# Altium PCB PCB2.PcbDoc
Units mm, origin at the board's own origin, x right, y up, seen from the top; angles counter-clockwise.
Board outline 55.12 x 52.96 mm, 2 copper layers (Top Layer, Bottom Layer); 29 components, 29 nets, 202 pads, 25 vias.
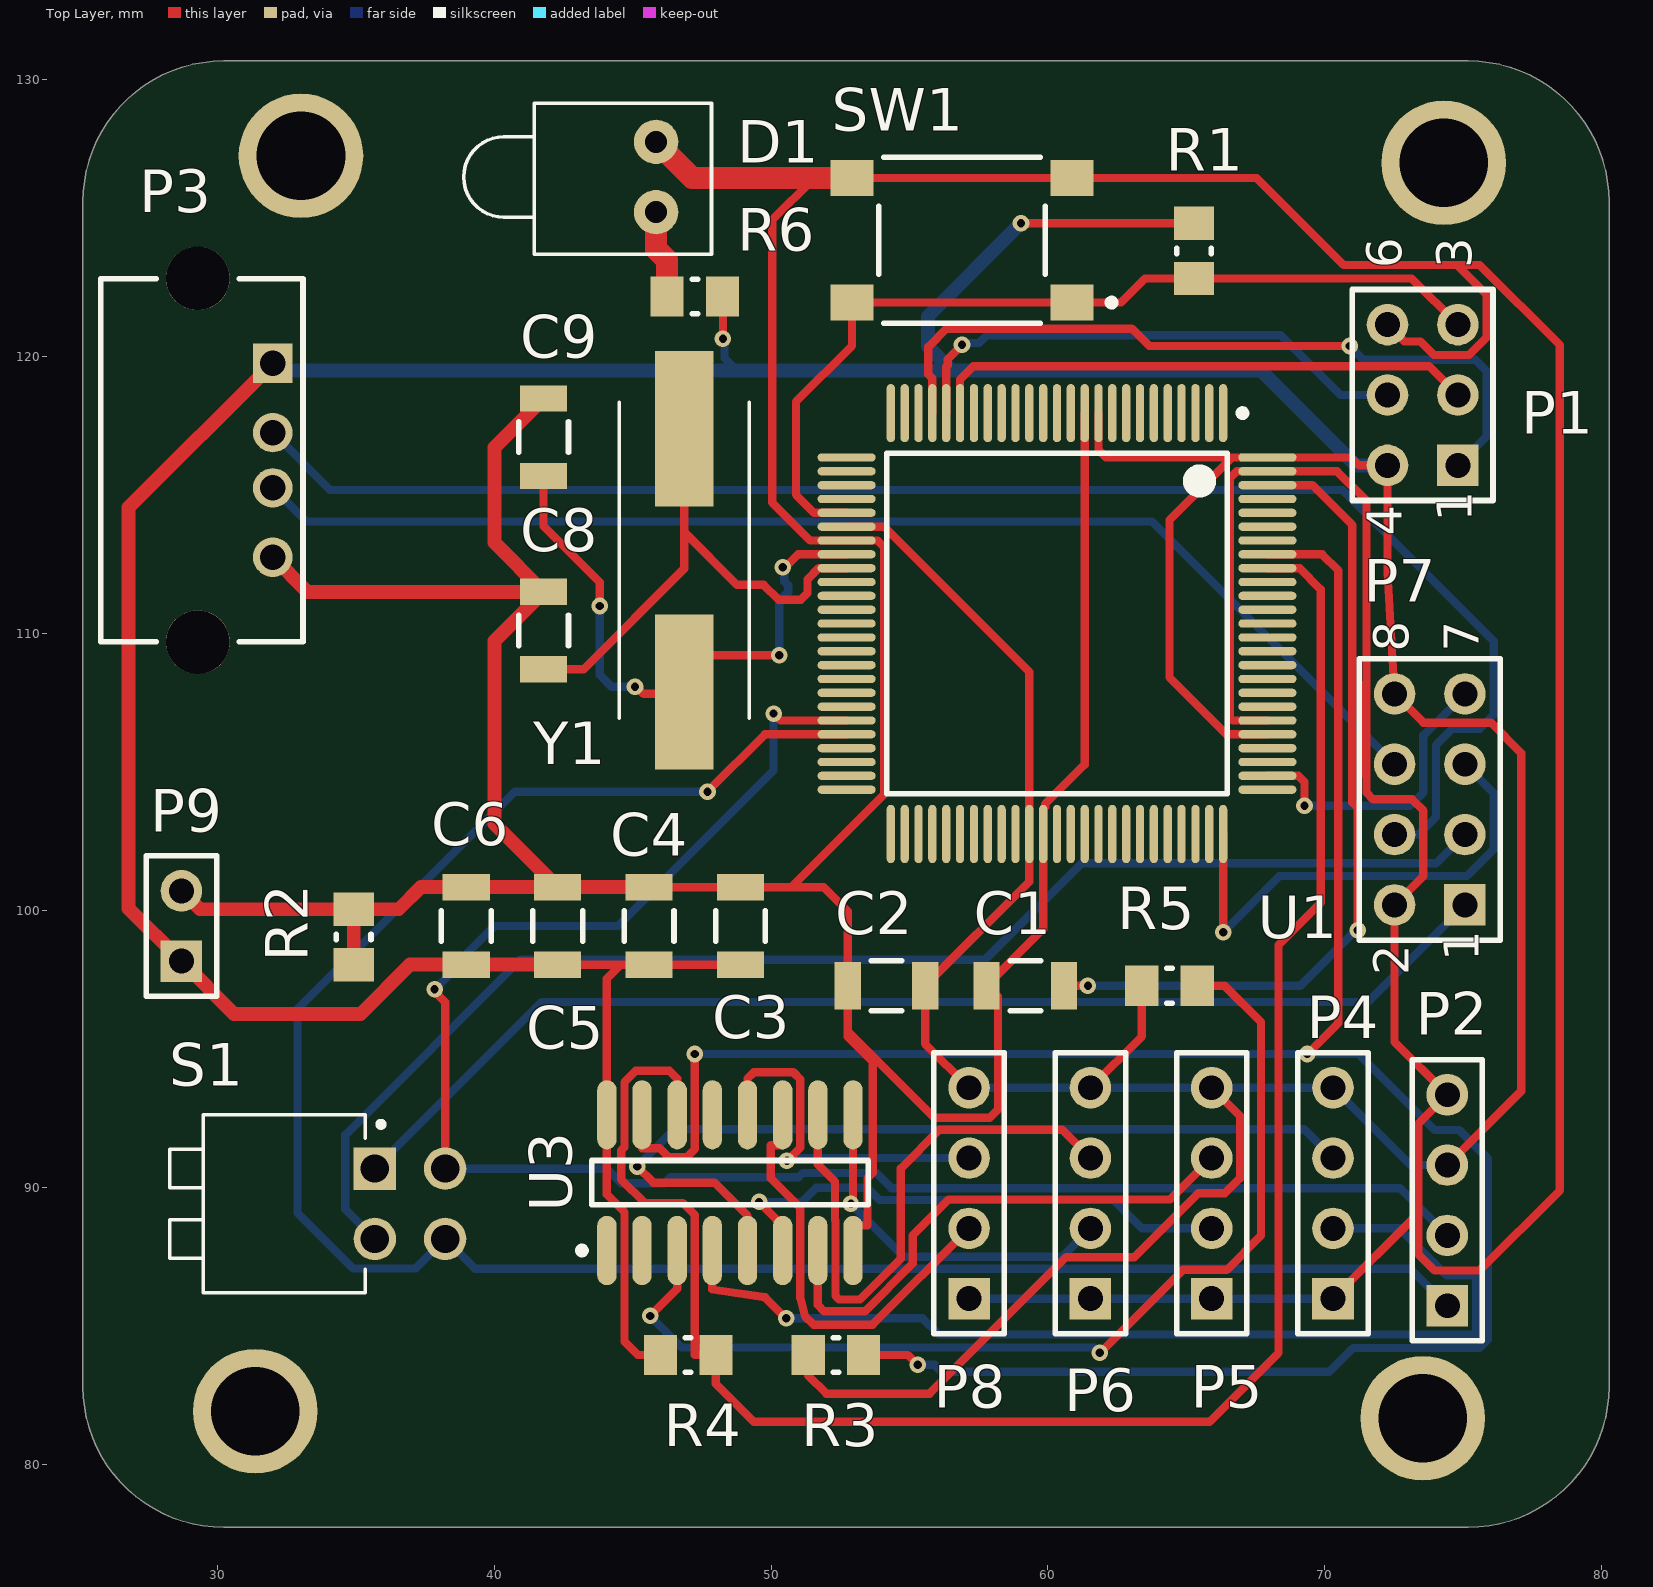
[diagram p0: Top Layer view]
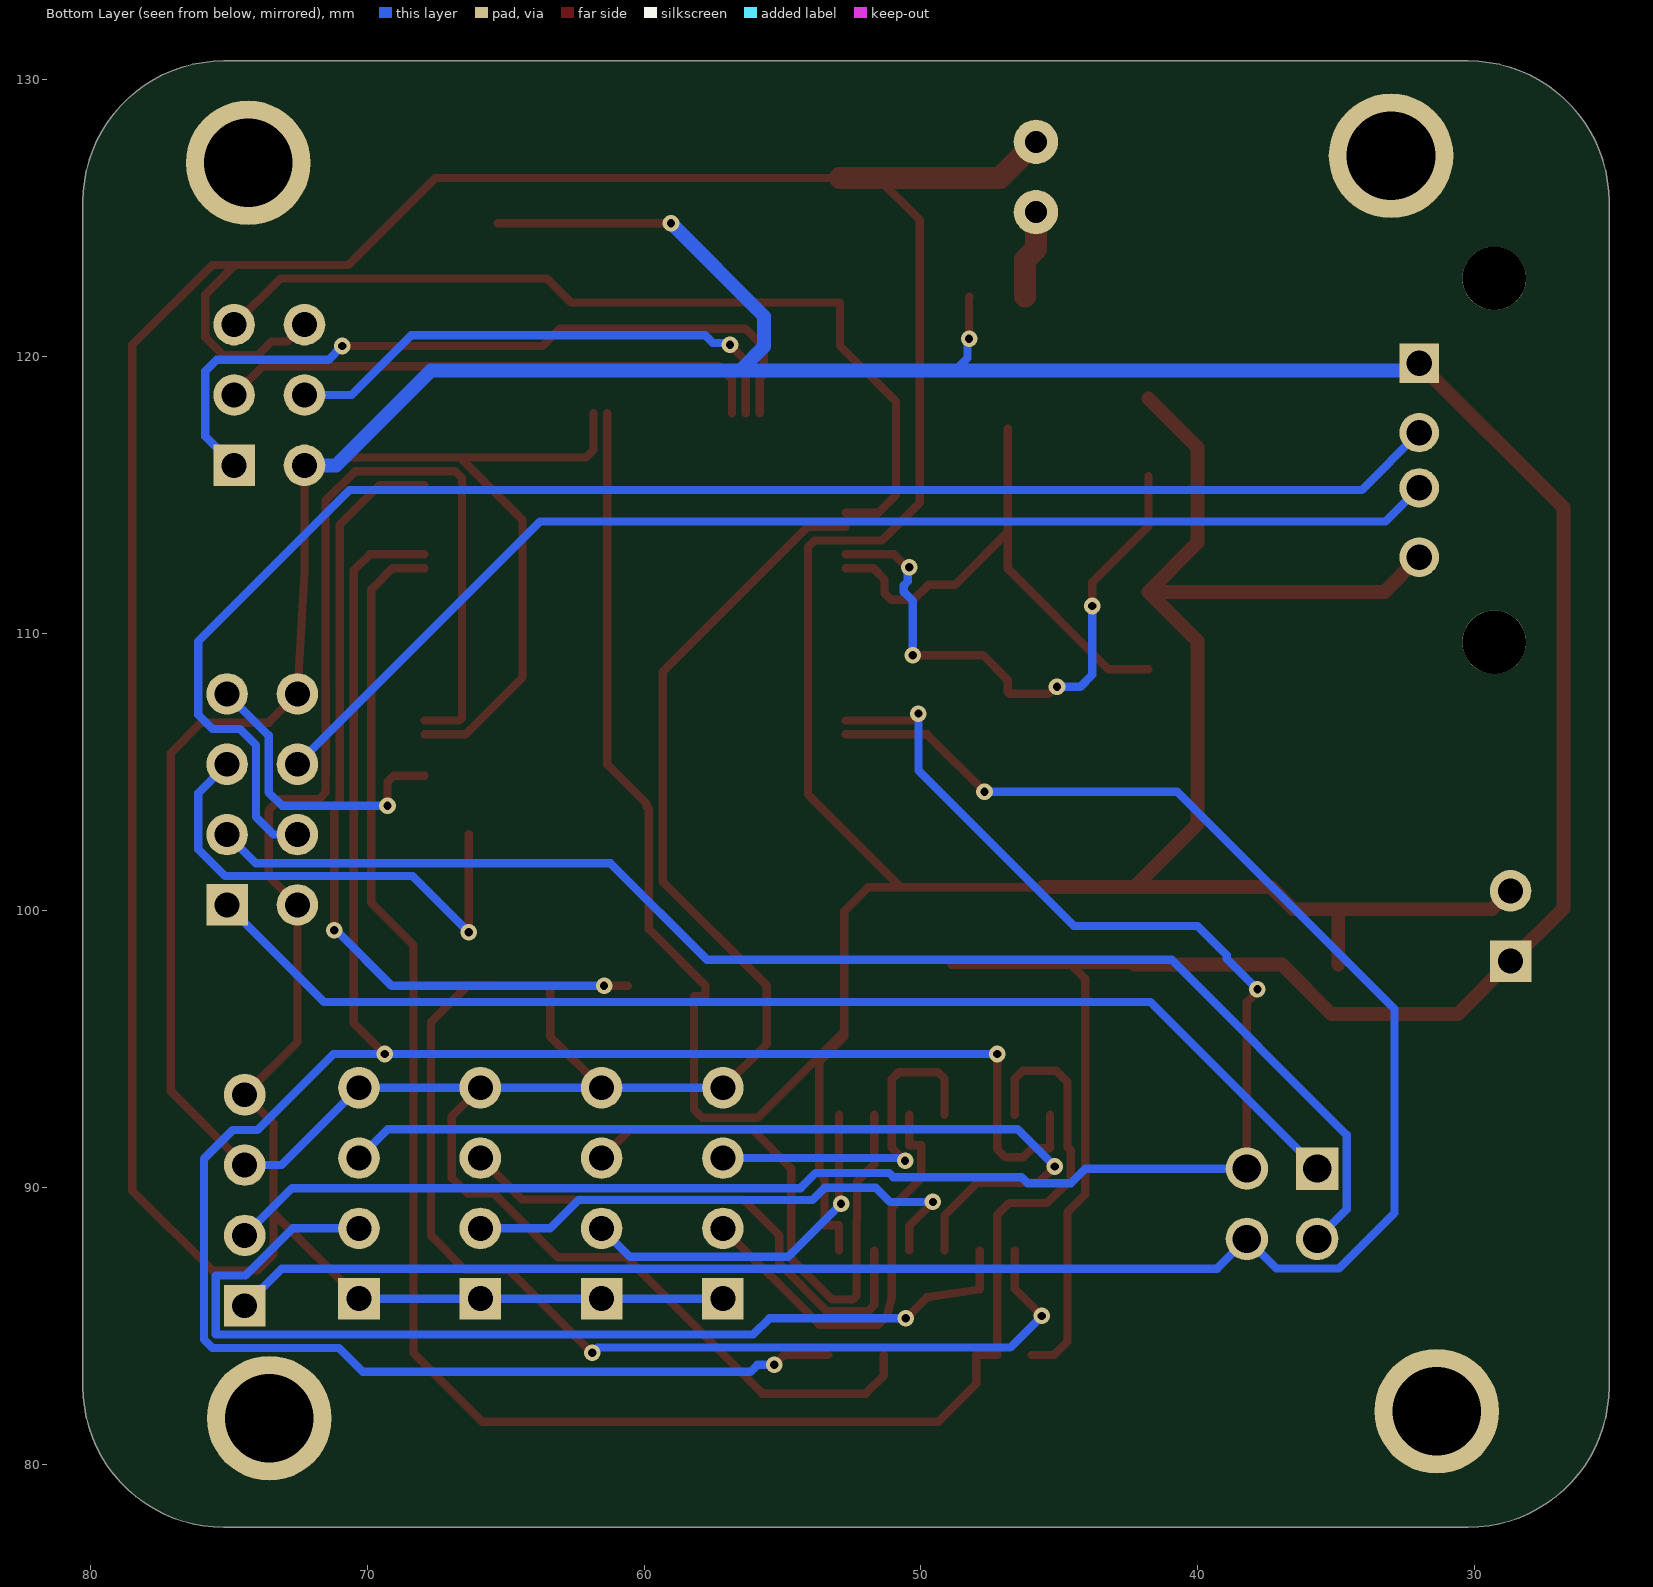
[diagram p1: Bottom Layer view, seen from below]
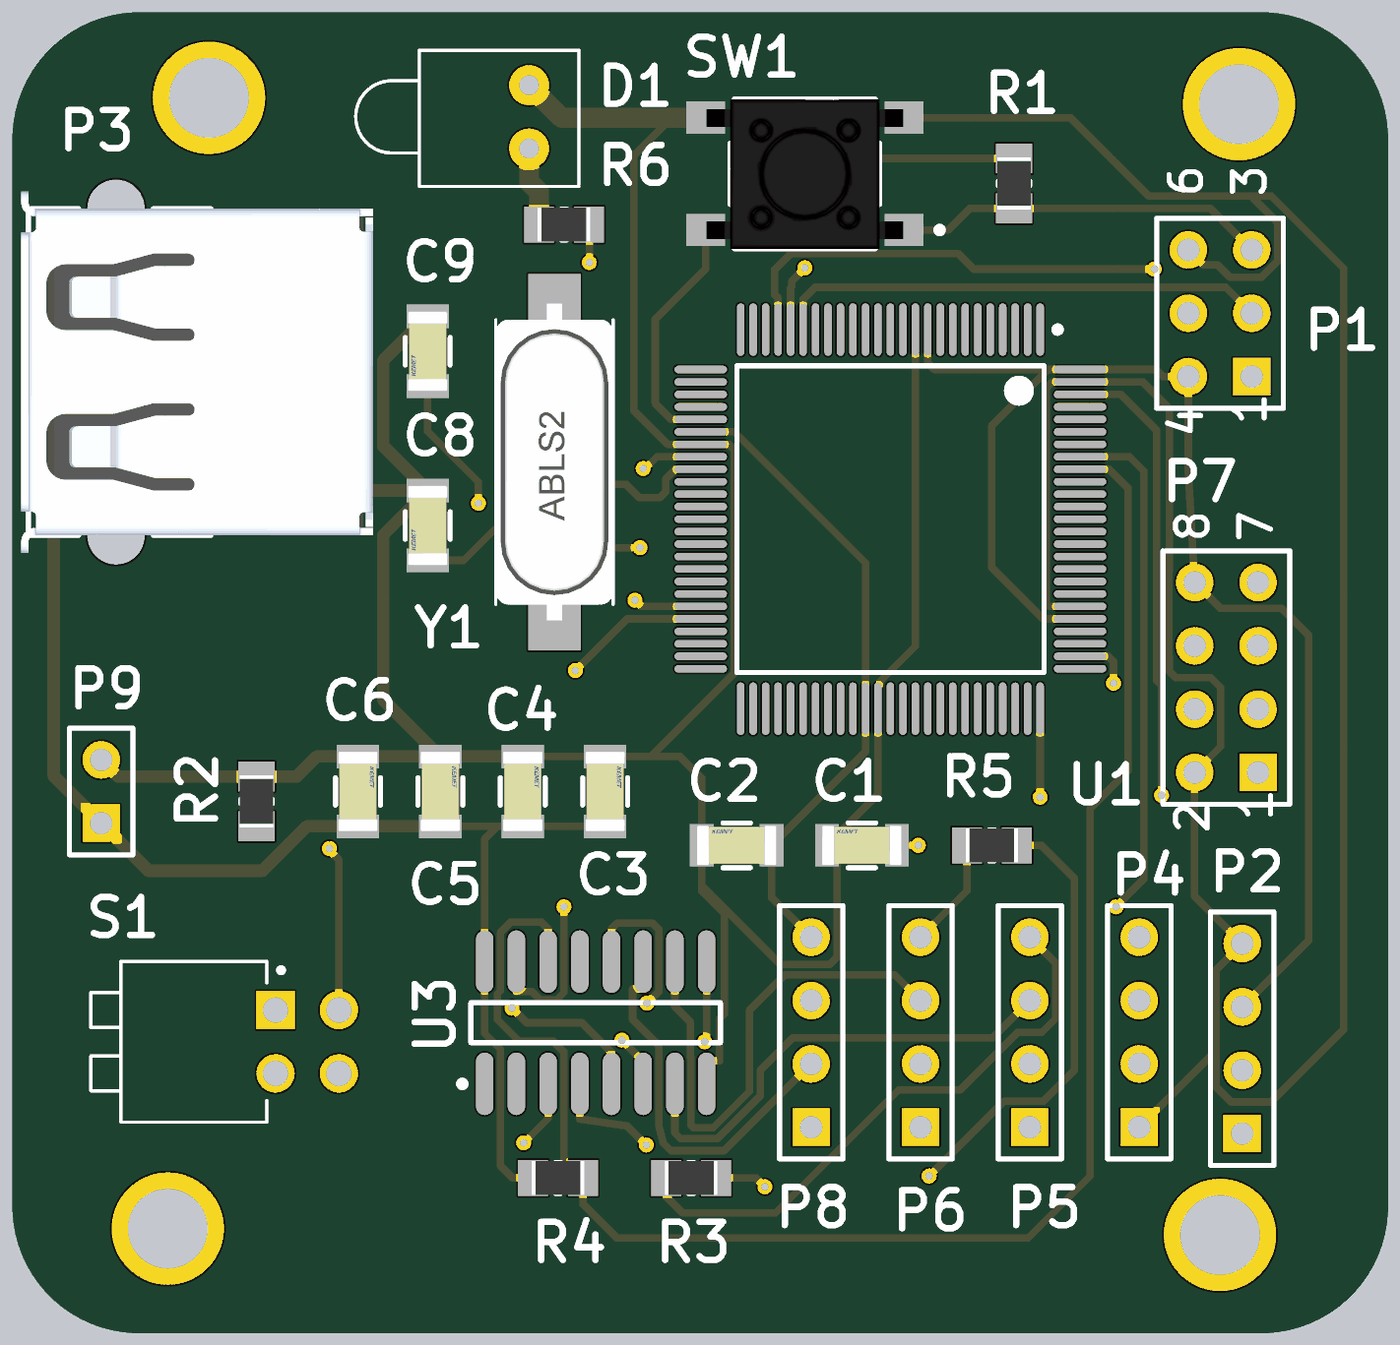
[diagram p2: 3D render of the assembled board from above, using the file's embedded part models]

## Layer stack, top to bottom
Top Solder: solder mask 0.0102, Solder Resist, Dk 3.5
Top Layer: signal copper 0.0356
Dielectric 1: dielectric 0.32, FR-4, Dk 4.8
Bottom Layer: signal copper 0.0356
Bottom Solder: solder mask 0.0102, Solder Resist, Dk 3.5

## Board outline
25.146,82.804 25.146,125.603 cw(c30.226,125.603) 30.226,130.683 75.184,130.683 cw(c75.184,125.603) 80.264,125.603 80.264,82.804 cw(c75.184,82.804) 75.184,77.724 30.226,77.724 cw(c30.226,82.804)

## Design rules (kind name [scope] priority, off if disabled: settings)
BoardOutlineClearance [All] p1: gap=0.2 ignorepadtopadclearanceinfootprint=FALSE
Clearance [All] p1: gap=0.127 ignorepadtopadclearanceinfootprint=FALSE except(0.25: Arc-Hole Track-Hole SMDPad-Hole THPad-Hole Via-Hole Fill-Hole Poly-Hole Region-Hole Text-Hole)
ComponentClearance [All] p1: gap=0.127 collisioncheckmode=3 verticalgap=0.127 showdistances=TRUE
DiffPairsRouting [All] p1: maxlimit=0.254 minlimit=0.127 mostfreqgap=0.127 toplayer_minwidth=0.127 toplayer_maxwidth=25.4 toplayer_prefwidth=0.127 bottomlayer_minwidth=0.127 bottomlayer_maxwidth=25.4 bottomlayer_prefwidth=0.127 maxuncoupledlength=12.7
Height [All] p1: minheight=0 maxheight=1816.048 prefheight=12.7
HoleSize [All] p1: absolutevalues=TRUE maxlimit=6.3 minlimit=0.3 maxpercent=80.000 minpercent=20.000
HoleToHoleClearance [All] p1: gap=0.25 allowstackedmicrovias=FALSE
MinimumAnnularRing [All] p1: minimumring=0.076
MinimumSolderMaskSliver [All] p1: minsoldermaskwidth=0
PlaneClearance [All] p1: clearance=0.127
PlaneConnect PlaneConnectPowerPads [InPadClass('PowerPads')] p1: planeconnectstyle=Direct reliefexpansion=0.508 reliefentries=4 reliefconductorwidth=0.254 reliefairgap=0.254
PlaneConnect [All] p2: pad.planeconnectstyle=Relief pad.reliefexpansion=0.3 pad.reliefentries=4 pad.reliefconductorwidth=0.127 pad.reliefairgap=0.127 via.planeconnectstyle=Direct via.reliefexpansion=0.3 via.reliefentries=4 via.reliefconductorwidth=0.127 via.reliefairgap=0.127
PolygonConnect PolygonConnectPowerPads [All vs (InPadClass('PowerPads'))] p1: connectstyle=Direct reliefconductorwidth=0.254 reliefentries=4 polygonreliefangle="90 Angle" airgapwidth=0.254
PolygonConnect [All] p2: thpad.connectstyle=Relief thpad.reliefconductorwidth=0.127 thpad.reliefentries=4 thpad.polygonreliefangle="90 Angle" thpad.airgapwidth=0.127 smdpad.connectstyle=Relief smdpad.reliefconductorwidth=0.127 smdpad.reliefentries=4 smdpad.polygonreliefangle="90 Angle" smdpad.airgapwidth=0.127 via.connectstyle=Direct via.reliefconductorwidth=0.127 via.reliefentries=4 via.polygonreliefangle="90 Angle" via.airgapwidth=0.127
RoutingVias [All] p1: holewidth=0.3 width=0.6 viastyle="Through Hole" minholewidth=0.3 minwidth=0.6 maxholewidth=0.6 maxwidth=6.6
SilkToSilkClearance [All] p1: silktosilkclearance=0
SilkToSolderMaskClearance [IsPad] p1: minsilkscreentomaskgap=0.127 clearancetoexposedcopper=TRUE
SolderMaskExpansion [All] p1: expansion=0.075 istentingtop=FALSE
Width [All] p1: maxlimit=25.4 minlimit=0.127 preferedwidth=0.3 toplayer_minwidth=0.2 minimp=50.000000 maximp=50.000000 favimp=50.000000
20 further rules are at their usual default settings.

## Classes and differential pairs
component class Main: D1 P3 P4 P5 P6 P7 P8 P9 R6
component class Designator: C1 C2 C3 C4 C6 C8 C9 P1 P2 R1 R2 S1 SW1 U1 Y1

## Components (designator, comment, footprint, x,y, rotation, side; value= is the part's Value field where it differs from the comment)
C1 "100nF" FP-C1206C-EB-MFG 59.182,97.282 r0 top value="0.10 μF"
C2 "100nF" FP-C1206C-EB-MFG 54.165,97.282 r0 top value="0.10 μF"
C3 "100nF" FP-C1206C-EB-MFG 48.895,99.444 r270 top value="0.10 μF"
C4 "100nF" FP-C1206C-EB-MFG 45.593,99.444 r270 top value="0.10 μF"
C5 "100nF" FP-C1206C-EB-MFG 42.291,99.444 r270 top value="0.10 μF"
C6 "0.3uF" FP-C1206C-EB-MFG 38.989,99.444 r270 top value="0.10 μF"
C8 "22pF" FP-C1206C-EB-MFG 41.783,110.109 r90 top value="0.10 μF"
C9 "22pF" FP-C1206C-EB-MFG 41.783,117.094 r90 top value="0.10 μF"
D1 "LED1" LED-1 45.847,126.492 r180 top (schematic designator D?)
P1 "Header 3X2A" HDR2X3_CEN 74.803,116.078 r90 top
P2 "Header 4" HDR1X4 74.422,85.725 r90 top
P3 "USB-A1HSW6" OST_USB-A1HSW6 25.494,116.261 r270 top
P4 "Header 4" HDR1X4 70.294,85.979 r90 top
P5 "Header 4" HDR1X4 65.913,85.979 r90 top
P6 "Header 4" HDR1X4 61.531,85.979 r90 top
P7 "Header 4X2" HDR2X4 75.057,100.203 r90 top
P8 "Header 4" HDR1X4 57.15,85.979 r90 top
P9 "Header 2" HDR1X2 28.702,98.171 r90 top
R1 "10K" RESC2013X60X35ML10T20 65.278,123.825 r90 top
R2 "1M" RESC2013X60X35ML10T20 34.925,99.044 r90 top
R3 "10K" RESC2013X60X35ML10T20 52.34,83.947 r180 top
R4 "10K" RESC2013X60X35ML10T20 47.006,83.947 r180 top
R5 "1M" RESC2013X60X35ML10T20 64.389,97.282 r180 top
R6 "" RESC2013X60X35ML10T20 47.244,122.174 r0 top
S1 "KAS2102E" SW_KAS2102E 36.957,89.408 r270 top
SW1 "PTS645SM43SMTR92LFS" FP-PTS645SM43SMTR92LFS-MFG 56.896,124.206 r180 top
U1 "ATmega2560-16AU" 100A_M 60.325,110.363 r270 top
U3 "PCA9546ADG4" D16_M 48.514,90.17 r90 top
Y1 "ABLS2-16.000MHZ-D4Y-T" XTAL_ABLS2-16.000MHZ-D4Y-T 46.863,112.649 r90 top

## Footprints (in the part's own frame and the unit in brackets; to place one, negate y for a bottom-side part, rotate by r counter-clockwise, add the part's x,y. Pads: shape width x height; smd on the part's side, far side on the other; paste and mask are expansions set on the pad)
100A_M [mm] "Thin QFP, 100-Leads, Body 14x14mm, Pitch 0.5mm, IPC Low Density"
  oval 2.1x0.3 smd: 1(-7.6,6) 2(-7.6,5.5) 3(-7.6,5) 4(-7.6,4.5) 5(-7.6,4) 6(-7.6,3.5) 7(-7.6,3) 8(-7.6,2.5) 9(-7.6,2) 10(-7.6,1.5) 11(-7.6,1) 12(-7.6,0.5) 13(-7.6,0) 14(-7.6,-0.5) 15(-7.6,-1) 16(-7.6,-1.5) 17(-7.6,-2) 18(-7.6,-2.5) 19(-7.6,-3) 20(-7.6,-3.5) 21(-7.6,-4) 22(-7.6,-4.5) 23(-7.6,-5) 24(-7.6,-5.5) 25(-7.6,-6) 51(7.6,-6) 52(7.6,-5.5) 53(7.6,-5) 54(7.6,-4.5) 55(7.6,-4) 56(7.6,-3.5) 57(7.6,-3) 58(7.6,-2.5) 59(7.6,-2) 60(7.6,-1.5) 61(7.6,-1) 62(7.6,-0.5) 63(7.6,0) 64(7.6,0.5) 65(7.6,1) 66(7.6,1.5) 67(7.6,2) 68(7.6,2.5) 69(7.6,3) 70(7.6,3.5) 71(7.6,4) 72(7.6,4.5) 73(7.6,5) 74(7.6,5.5) 75(7.6,6)
  oval 0.3x2.1 smd: 26(-6,-7.6) 27(-5.5,-7.6) 28(-5,-7.6) 29(-4.5,-7.6) 30(-4,-7.6) 31(-3.5,-7.6) 32(-3,-7.6) 33(-2.5,-7.6) 34(-2,-7.6) 35(-1.5,-7.6) 36(-1,-7.6) 37(-0.5,-7.6) 38(0,-7.6) 39(0.5,-7.6) 40(1,-7.6) 41(1.5,-7.6) 42(2,-7.6) 43(2.5,-7.6) 44(3,-7.6) 45(3.5,-7.6) 46(4,-7.6) 47(4.5,-7.6) 48(5,-7.6) 49(5.5,-7.6) 50(6,-7.6) 76(6,7.6) 77(5.5,7.6) 78(5,7.6) 79(4.5,7.6) 80(4,7.6) 81(3.5,7.6) 82(3,7.6) 83(2.5,7.6) 84(2,7.6) 85(1.5,7.6) 86(1,7.6) 87(0.5,7.6) 88(0,7.6) 89(-0.5,7.6) 90(-1,7.6) 91(-1.5,7.6) 92(-2,7.6) 93(-2.5,7.6) 94(-3,7.6) 95(-3.5,7.6) 96(-4,7.6) 97(-4.5,7.6) 98(-5,7.6) 99(-5.5,7.6) 100(-6,7.6)
  silkscreen extent -7.72,-6.15 6.15,6.83, body extent -7,-7 7,7, height 1.6
D16_M [mm] "SOIC, 16-Leads, Body 9.9x3.9mm, Pitch 1.27mm, IPC Low Density"
  oval 2.5x0.7 smd: 1(-2.45,4.445) 2(-2.45,3.175) 3(-2.45,1.905) 4(-2.45,0.635) 5(-2.45,-0.635) 6(-2.45,-1.905) 7(-2.45,-3.175) 8(-2.45,-4.445) 9(2.45,-4.445) 10(2.45,-3.175) 11(2.45,-1.905) 12(2.45,-0.635) 13(2.45,0.635) 14(2.45,1.905) 15(2.45,3.175) 16(2.45,4.445)
  silkscreen extent -2.57,-5 0.8,5.47, body extent -1.99,-5 1.99,5, height 1.75
FP-C1206C-EB-MFG [mm]
  rect 0.95x1.7 smd paste+0 mask+0: 1(-1.4,0) 2(1.4,0)
  silkscreen extent -0.55,-0.9 0.55,0.9, body extent -2,-1 2,1, height 0.25
FP-PTS645SM43SMTR92LFS-MFG [mm]
  rect 1.55x1.3 smd paste+0 mask+0: 1(-3.975,2.25) 2(3.975,2.25) 3(-3.975,-2.25) 4(3.975,-2.25)
  silkscreen extent -5.53,-3 3,3, body extent -4.85,-3.1 4.85,3.1, height 0.25
HDR1X2 [mm] "Connector; Header; 2 Position"
  rect 1.5x1.5 hole 0.9: 1(0,0)
  round 1.5 hole 0.9: 2(2.54,0)
  silkscreen extent -1.27,-1.27 3.81,1.27
HDR1X4 [mm] "Connector; Header; 4 Position"
  rect 1.5x1.5 hole 0.9: 1(0,0)
  round 1.5 hole 0.9: 2(2.54,0) 3(5.08,0) 4(7.62,0)
  silkscreen extent -1.27,-1.27 8.89,1.27
HDR2X3_CEN [mm] "Connector; Header; 3x2 Position"
  rect 1.5x1.5 hole 0.9: 1(0,0)
  round 1.5 hole 0.9: 2(2.54,0) 3(5.08,0) 4(0,2.54) 5(2.54,2.54) 6(5.08,2.54)
  silkscreen extent -1.27,-1.27 6.35,3.81
HDR2X4 [mm] "Connector; Header; 4x2 Position"
  rect 1.5x1.5 hole 0.9: 1(0,0)
  round 1.5 hole 0.9: 2(0,2.54) 3(2.54,0) 4(2.54,2.54) 5(5.08,0) 6(5.08,2.54) 7(7.62,0) 8(7.62,2.54)
  silkscreen extent -1.27,-1.27 8.89,3.81
LED-1 [mm] "LED; 2 Leads"
  round 1.6 hole 0.8: 1(0,1.27) 2(0,-1.27)
  silkscreen extent -2,-2.67 6.95,2.79
OST_USB-A1HSW6 [mm]
  rect 1.428x1.428 / inner round 1.428 / far side rect 1.428x1.428 hole 0.92: 1(-3.5,6.51)
  round 1.428 hole 0.92: 2(-1,6.51) 3(1,6.51) 4(3.5,6.51)
  round 2.3 hole 2.3 unplated: ""(-6.57,3.8) ""(6.57,3.8)
  silkscreen extent -6.55,0.29 6.55,7.6, body extent -7.9,0 7.9,14.1, height 3.56
RESC2013X60X35ML10T20 [mm] "Chip Resistor, 2-Leads, Body 2.1x1.35mm, IPC Low Density"
  rect 1.2x1.45 smd: 1(-1,0) 2(1,0)
  silkscreen extent -0.1,-0.62 0.1,0.62, body extent -1.05,-0.68 1.05,0.67, height 0.6
SW_KAS2102E [mm]
  rect 1.53x1.53 hole 1.02: 1(-1.27,-1.27)
  round 1.53 hole 1.02: 2(-1.27,1.27) 3(1.27,-1.27) 4(1.27,1.27)
  silkscreen extent -3.22,-8.67 3.22,-0.95
XTAL_ABLS2-16.000MHZ-D4Y-T [mm]
  rect 5.6x2.1 smd: 1(-4.75,0) 2(4.75,0)
  silkscreen extent -5.7,-2.35 5.7,2.35, body extent -6.35,-2.35 6.35,2.35, height 3.16

## Part data
C1 C2 C3 C4 C5 C6 C8 C9: library part CMP-1037-04222-2, "CAP CER 0.1UF 200V 10% X7R 1206", Capacitance="0.10 μF", Manufacturer=KEMET, Manufacturer Part Number=C1206C104K2RACTU, Package=C1206C-EB, Temperature="-55°C to +150°C", Temperature Characteristic=X7R, Temperature Coefficient=15%, Temperature Range High=+150°C, Temperature Range Low=-55°C, Tolerance=0.1, Voltage Rating="200 V", Automotive=Yes, Automotive Grade="Grade 0", Category=Cap, ComponentLink2Description=Datasheet, ComponentLink2URL=https://content.kemet.com/datasheets/KEM_C1007_X8R_ULTRA_150C_SMD.pdf, Device Class L1="Passive Components", Device Class L2=Capacitors, Device Class L3="Ceramic Capacitors", Digikey Description="CAP CER 0.1UF 200V 10% X7R 1206", Height=0.88mm, Ipc Land Pattern Name=CAPC320160X78, Lead Free=Yes, Material=Ceramic, Mouser Description="Multilayer Ceramic Capacitors MLCC - SMD/SMT 200volts 0.1uF X7R 10%", Octopart=https://octopart.com/c1206c104k2ractu-kemet-9138344, RoHS=TRUE
D1: "Typical RED GaAs LED", LatestRevisionDate=08-Jul-2005, LatestRevisionNote="Mech Layer 1 removed.", PackageDescription="LED; 2 Leads", PackageReference=LED-1, Published=8-Jun-2000, Publisher="Altium Limited"
P1: "Header, 3-Pin, Dual row", LatestRevisionDate=17-Jul-2002, LatestRevisionNote="Re-released for DXP Platform.", Publisher="Altium Limited"
P2 P4 P5 P6 P8: "Header, 4-Pin", LatestRevisionDate=17-Jul-2002, LatestRevisionNote="Re-released for DXP Platform.", Publisher="Altium Limited"
P3: "USB-A (USB TYPE-A) - Receptacle Connector 4 Position Through Hole, Right Angle", Package=None, Availability="In Stock", Check_prices=https://www.snapeda.com/parts/USB-A1HSW6/On+Shore+Technology+Inc./view-part/?ref=eda, MF="On Shore", MP=USB-A1HSW6, Price=None, Purchase-URL=https://pricing.snapeda.com/search/part/USB-A1HSW6/?ref=eda, SnapEDA_Link=https://www.snapeda.com/parts/USB-A1HSW6/On+Shore+Technology+Inc./view-part/?ref=snap
P7: "Header, 4-Pin, Dual row", LatestRevisionDate=17-Jul-2002, LatestRevisionNote="Re-released for DXP Platform.", Publisher="Altium Limited"
P9: "Header, 2-Pin", LatestRevisionDate=17-Jul-2002, LatestRevisionNote="Re-released for DXP Platform.", Publisher="Altium Limited"
R1 R2 R3 R4 R5 R6: library part CMP-2100-03673-1, "Chip Resistor, 0 Ohm, Jumper, +/- 5%, 0.125 W, -55 to 155 degC, 0805 (2012 Metric), RoHS, Tape and Reel", Case Code (Imperial)=0805, Case Code (Metric)=2012, Manufacturer=Yageo, Max Operating Temperature=155degC, Min Operating Temperature=-55degC, Package Description="2-Pin Surface Mounted Device, Body 2 x 1.25 mm", Power Rating=125mW, Resistance=0mOhm, Temperature Coefficient=200ppm/degreesC, Tolerance=5%, Voltage Rating=150V, Case/Package=0805, Composition=ThickFilm, Contact Plating=Tin, Datasheet URL=http://www.yageo.com/NewPortal/yageodocoutput?fileName=/pdf/R-Chip/PYu-RC_Group_51_RoHS_L_5.pdf, Datasheet Version="Rev. 5, 10/2016", Depth=1.25mm, Height=0.5mm, Lead Free=LeadFree, Length=2mm, Manufacturer URL=http://www.yageo.com/, Military Standard=Not, Number of Pins=2, Package Reference=0805, Packaging=TapeandReel, Radiation Hardening=No, REACH SVHC=Unknown, RoHSCompliant=true, Termination=SMD/SMT, Voltage Rating (DC)=150V, Width=1.25mm
S1: Package=None, Availability=Unavailable, MP=KAS2102E, Price=None
SW1: library part CMP-2000-05160-2, "SWITCH TACTILE SPST-NO 0.05A 12V", Case/Package=SMD/SMT, Color=Black, Contact Resistance=100mR, Current Rating=50mA, Max Operating Temperature=60°C, Max Voltage Rating (DC)=12V, Min Operating Temperature=-20°C, Operating Force=160gf, Package Quantity=1, Actuator Length=0.85mm, Actuator Material=Nylon, Actuator Type=Standard, Contact Material=Silver, Contact Plating=Silver, Depth=9mm, Illumination Type=Non-Illuminated, Lead Free="Lead Free", Length=6mm, Max Current Rating=50mA, Mechanical Life=100000Cycles, Mount="Surface Mount", Orientation=Straight, Packaging="Tape and Reel", REACH SVHC="No SVHC", Switch Function=Off-Mom, Termination="Gull Wing", Throw Configuration=SPST, Voltage Rating (DC)=12V
U1: library part CMP-0095-00210-2, "8-bit AVR Microcontroller, 4.5-5.5V, 16MHz, 256KB Flash, 4KB EEPROM, 8KB SRAM, 86 GPIO pins, 100-pin TQFP, Industrial Grade (-40°C to 85°C), Pb-Free", Code_JEDEC=MS-026-AED, ComponentLink1Description="Manufacturer URL", ComponentLink1URL=http://www.atmel.com/, ComponentLink2Description="ATmega640/1280/1281/2560/2561 Datasheet", ComponentLink2URL=http://www.atmel.com/dyn/resources/prod_documents/doc2549.pdf, ComponentLink3Description="ATmega640/1280/1281/2560/2561 Summary", ComponentLink3URL=http://www.atmel.com/dyn/resources/prod_documents/2549S.pdf, DatasheetVersion="revN, May-2011", PackageDescription="100-Pin Thin Profile Plastic Quad Flat Pack (TQFP), 14 x 14 x 1.0 mm Body, 0.5 mm Pitch", PackageReference=100A, PackageVersion="revD, Oct-2010", RevisionNote="DatasheetVersion & PackageVersion updated. URLs added."
U3: library part CMP-0314-00094-1, "4-Channel I2C and SMBus Multiplexer with Reset Functions, 2.3 to 5.5 V, -40 to 85 degC, 16-pin SOIC (D), Green (RoHS & no Sb/Br)", 5V Tolerant I/O=Yes, Manufacturer="Texas Instruments", Max Frequency(kHz)=400, Channel Width=4, Code_JEDEC=MS-012AC, ComponentLink1Description=Datasheet, ComponentLink1URL=http://www.ti.com/general/docs/lit/getliterature.tsp?genericPartNumber=PCA9546A&fileType=pdf, ComponentLink2Description="Package Specification", ComponentLink2URL=http://www.ti.com/litv/pdf/mpds178g, DatasheetVersion=SCPS148E, Eco-Plan="Green (RoHS & no Sb/Br)", fSCLK(Max)(MHz)="100, 400", I2C Address="1110 xxx", Mounting Technology="Surface Mount", Open Drain I/O Type=Yes, PackageDescription="16-Pin Plastic Small Outline Integrated Circuit, 9.9 x 3.9 mm, Pitch 1.27 mm Pitch", PackageReference=D16, PackageVersion="revM, Jun-2011", PartNumber=PCA9546ADG4, Reset Input=Yes, Simultaneously Active Channels="1 to 4", SubFamily="I2C Multiplexer, Switch", tpd max(ns)="0.3, 1", Vcc range(V)="2.3 to 5.5", VCC(Max)(V)=5.5, VCC(Min)(V)=2.3
Y1: "HC/49US (AT49) LOW PROFILE SURFACE MOUNT MICROPROCESSOR CRYSTAL", Package="HC49/US Abracon", Availability="In Stock", Check_prices=https://www.snapeda.com/parts/ABLS2-16.000MHZ-D4Y-T/Abracon+LLC/view-part/?ref=eda, MF=Abracon, MP=ABLS2-16.000MHZ-D4Y-T, Price=None, Purchase-URL=https://pricing.snapeda.com/search/part/ABLS2-16.000MHZ-D4Y-T/?ref=eda, SnapEDA_Link=https://www.snapeda.com/parts/ABLS2-16.000MHZ-D4Y-T/Abracon+LLC/view-part/?ref=snap

## Free pads (board coordinates)
  round 4.5 hole 3.2: 17(74.295,127) 18(73.533,81.661) 19(31.369,81.915) 20(33.02,127.254)

## Via types
v1: diameter 0.6, hole 0.3, Top Layer to Bottom Layer, 25 vias

## Nets (pads, with @x,y where several pads share a name; then routed paths per layer and width w, separated by ;. In a path a pad name is that pad's centre, name@x,y a point inside that pad or via, vN(x,y) a via of type N, cw(c..) or ccw(c..) an arc to the next point about the centre after c; other vN are vias at no path point)
+5: C2.2 C3.2 C4.2 C5.2 C6.2 P1.4 P2.3 P3.1 P4.4 P5.4 P6.4 P7.8 P8.4 P9.1 R1.2 R3.2 R4.2 R5.2 R6.2 U1.10 U1.31 U1.61 U1.80 U1.100 U3.16 | length 248.3
  Top Layer w0.3: C5.2 44.577,98.044 ; R4.2 45.187,83.947 44.704,84.43 44.704,89.106 44.069,89.741 U3.16 44.069,97.536 44.577,98.044 ; R6.2 48.26,122.158 v1(48.26,120.65) ; C3.2 C4.2 44.577,98.044 ; R3.2 51.34,83.204 51.994,82.55 55.728,82.55 60.655,87.478 63.119,87.478 65.43,89.789 66.397,89.789 66.94,90.332 66.94,92.572 P5.4 ; 53.848,113.863 U1.31 54.077,113.863 59.325,108.615 U1.61 59.325,101.042 C2.2 55.565,95.184 P8.4 ; v1(59.025,124.825) R1.2 ; P6.4 63.389,95.457 R5.2 ; U1.10 61.825,116.637 62.099,116.363 66.65,116.363 ; U1.80 66.446,106.363 64.389,108.42 64.389,114.102 66.65,116.363 ; P2.3 77.089,93.472 77.089,105.689 75.997,106.782 73.558,106.782 P7.8 72.263,112.217 P1.4 71.237,116.078 70.952,116.363 U1.100 66.65,116.363
  Top Layer w0.5: P3.1 26.797,114.554 26.797,100.076 P9.1 30.607,96.266 35.179,96.266 36.957,98.044 C6.2 C5.2
  Bottom Layer w0.3: v1(48.26,120.65) 48.317,120.593 48.317,119.958 48.768,119.507 ; P8.4 P6.4 P5.4 P4.4 73.088,90.805 P2.3
  Bottom Layer w0.5: P3.1 32.258,119.507 48.768,119.507 56.52,119.507 ; v1(59.025,124.825) 55.662,121.463 55.662,120.365 56.52,119.507 ; P1.4 71.12,116.078 67.691,119.507 56.52,119.507
AREF: C1.2 U1.98 | length 29.8
  Top Layer w0.3: C1.2 v1(61.443,97.282) ; U1.98 69.549,115.363 70.993,113.919 70.993,103.899 71.189,103.703 v1(71.189,99.289)
  Bottom Layer w0.3: v1(61.443,97.282) 69.113,97.282 71.12,99.289 v1(71.189,99.289)
D+: P3.3 P7.6 | length 44.6
  Bottom Layer w0.3: P3.3 33.219,114.046 63.754,114.046 P7.6
D-: P3.2 P7.4 | length 56.8
  Bottom Layer w0.3: P3.2 34.076,115.189 70.637,115.189 76.098,109.728 76.098,107.061 75.59,106.553 74.6,106.553 74.016,105.969 74.016,103.378 73.381,102.743 P7.4
GND: C1.1 C2.1 C3.1 C4.1 C5.1 C6.1 C8.2 C9.2 D1.2 P1.6 P2.4 P3.4 P4.1 P5.1 P6.1 P7.2 P8.1 P9.2 R2.1 R2.2 SW1.3 SW1.4 U1.11 U1.32 U1.62 U1.81 U1.99 U3.8 | length 279.7
  Top Layer w0.3: C4.1 C3.1 50.73,100.844 ; 51.562,126.456 50.038,124.932 50.038,114.735 51.41,113.363 U1.32 53.848,113.363 54.077,113.134 54.077,104.191 50.73,100.844 ; SW1.4 SW1.3 67.539,126.456 70.678,123.317 74.778,123.317 ; U3.8 52.959,88.634 53.478,88.634 53.478,90.333 53.67,90.526 53.67,94.539 52.766,95.443 52.766,95.647 ; U1.11 61.325,105.267 59.898,103.84 59.898,103.736 59.825,103.663 59.825,99.325 C1.1 57.782,96.901 58.191,96.901 58.191,92.812 57.893,92.513 55.899,92.513 52.766,95.647 ; U1.81 66.67,106.863 66.573,106.959 66.573,115.621 66.816,115.863 U1.99 70.446,115.863 71.501,114.808 71.501,108.259 71.49,108.248 71.49,104.858 71.501,104.847 71.501,104.256 71.744,104.013 73.152,104.013 73.558,103.607 73.558,101.244 P7.2 72.517,95.25 P2.4 73.381,92.304 73.381,89.065 ; P4.1 73.381,89.065 ; P1.6 72.873,120.548 73.457,120.548 73.939,120.066 75.209,120.066 75.844,120.701 75.844,122.25 74.778,123.317 ; 50.73,100.844 51.896,100.844 52.766,99.974 C2.1 52.766,95.647 ; 73.381,89.065 73.381,87.579 73.965,86.995 75.59,86.995 78.486,89.891 78.486,120.421 75.59,123.317 74.778,123.317
  Top Layer w0.5: P9.2 29.369,100.044 R2.2 ; P3.4 33.256,111.509 C8.2 ; R2.1 R2.2 ; C9.2 40.005,116.716 40.005,113.287 C8.2 ; C4.1 C5.1 ; R2.2 36.551,100.044 37.351,100.844 C6.1 C5.1 ; C8.2 40.005,109.731 40.005,103.13 C5.1
  Top Layer w0.8: D1.2 47.153,126.456 51.562,126.456 SW1.4
  Bottom Layer w0.3: P8.1 P6.1 P5.1 P4.1
MISO: P1.1 U1.22 | length 27.4
  Top Layer w0.3: U1.22 55.825,119.219 55.677,119.367 55.677,120.359 56.332,121.015 63.03,121.015 63.658,120.386 v1(70.901,120.386)
  Bottom Layer w0.3: v1(70.901,120.386) 71.399,119.888 75.438,119.888 75.844,119.482 75.844,117.119 P1.1
MOSI: P1.5 U1.21 | length 19.1
  Top Layer w0.3: U1.21 56.325,119.635 56.376,119.686 56.376,119.898 56.896,120.418 v1(56.896,120.438)
  Bottom Layer w0.3: v1(56.896,120.438) 56.953,120.495 57.514,120.495 57.796,120.777 68.402,120.777 70.561,118.618 P1.5
NetC8_1: C8.1 U1.34 Y1.2 | length 19.3
  Top Layer w0.3: C8.1 43.228,108.709 46.863,112.344 46.863,113.665 ; Y1.2 46.863,113.665 ; U1.34 51.721,112.363 51.317,111.958 51.317,111.461 51.082,111.226 50.264,111.226 49.73,111.76 48.768,111.76 46.863,113.665
NetC9_1: C9.1 U1.33 Y1.1 | length 21.5
  Top Layer w0.3: C9.1 41.783,113.882 43.815,111.85 v1(43.815,110.998) ; v1(45.085,108.077) 45.145,108.077 45.399,107.823 46.787,107.823 Y1.1 46.863,108.32 47.763,109.22 v1(50.292,109.22) ; v1(50.419,112.395) 50.5,112.395 50.968,112.863 U1.33
  Bottom Layer w0.3: v1(43.815,110.998) 43.815,108.507 44.245,108.077 v1(45.085,108.077) ; v1(50.292,109.22) 50.292,111.171 50.616,111.495 50.616,111.744 50.476,111.883 50.476,112.338 v1(50.419,112.395)
NetD?_1: D1.1 R6.1 | length 3.2
  Top Layer w0.8: D1.1 45.847,123.892 46.244,123.495 R6.1
NetP4_2: P4.2 U3.4 | length 37.6
  Top Layer w0.3: U3.4 47.879,86.309 49.784,86.03 v1(50.546,85.268)
  Bottom Layer w0.3: v1(50.546,85.268) 55.474,85.268 56.058,84.684 75.463,84.684 75.463,86.817 74.397,86.817 72.695,88.519 P4.2
NetP4_3: P4.3 U3.5 | length 32.1
  Top Layer w0.3: v1(45.161,90.754) 45.745,90.17 47.955,90.17 49.149,88.976 U3.5
  Bottom Layer w0.3: v1(45.161,90.754) 46.507,92.1 69.253,92.1 P4.3
NetP5_2: P5.2 U3.6 | length 19.3
  Top Layer w0.3: v1(49.565,89.475) 50.419,88.621 U3.6
  Bottom Layer w0.3: v1(49.565,89.475) 51.109,89.475 51.619,89.985 53.478,89.985 53.917,89.546 62.371,89.546 63.398,88.519 P5.2
NetP5_3: P5.3 U3.7 | length 19.2
  Top Layer w0.3: U3.7 51.689,85.75 51.918,85.522 53.385,85.522 55.111,87.248 55.111,88.258 56.413,89.56 64.414,89.56 P5.3
NetP6_2: P6.2 U3.9 | length 13.1
  Top Layer w0.3: v1(52.883,89.408) 52.959,89.484 U3.9
  Bottom Layer w0.3: v1(52.883,89.408) 54.799,87.492 60.504,87.492 P6.2
NetP6_3: P6.3 U3.10 | length 20.9
  Top Layer w0.3: U3.10 51.689,90.828 52.306,90.211 52.306,88.82 52.324,88.802 52.324,86.081 52.451,85.954 53.213,85.954 54.684,87.425 54.684,90.687 56.083,92.086 60.504,92.086 P6.3
NetP7_1: P7.1 S1.1 | length 43.3
  Bottom Layer w0.3: S1.1 41.707,96.698 71.552,96.698 P7.1
NetP7_3: P7.3 S1.3 | length 49.1
  Bottom Layer w0.3: S1.3 34.62,89.205 34.62,91.897 40.945,98.222 57.734,98.222 61.214,101.702 74.016,101.702 P7.3
NetP7_5: P7.5 U1.75 | length 18.1
  Top Layer w0.3: v1(66.325,99.212) U1.75
  Bottom Layer w0.3: v1(66.325,99.212) 68.357,101.244 75.133,101.244 76.098,102.21 76.098,104.242 P7.5
NetP7_7: P7.7 U1.77 | length 11
  Top Layer w0.3: U1.77 69.051,104.863 69.266,104.648 v1(69.266,103.784)
  Bottom Layer w0.3: v1(69.266,103.784) 73.076,103.784 73.558,104.267 73.558,106.324 P7.7
NetP8_2: P8.2 U3.11 | length 15.7
  Top Layer w0.3: U3.11 50.419,91.52 49.992,91.52 49.992,90.318 51.054,89.256 51.054,86.004 51.227,85.344 51.532,85.039 53.67,85.039 P8.2
NetP8_3: P8.3 U3.12 | length 13.2
  Top Layer w0.3: U3.12 49.149,93.929 49.378,94.158 50.8,94.158 51.054,93.904 51.054,91.44 v1(50.571,90.957)
  Bottom Layer w0.3: v1(50.571,90.957) 50.673,91.059 P8.3
NetR3_1: R3.1 U1.93 U3.15 | length 87.6
  Top Layer w0.3: U3.15 45.339,91.415 45.974,91.415 46.304,91.084 46.939,91.084 47.244,91.389 v1(47.244,94.818) ; R3.1 54.94,83.947 v1(55.296,83.591) ; U1.93 69.901,112.863 70.485,112.279 70.485,95.936 v1(69.367,94.818)
  Bottom Layer w0.3: v1(47.244,94.818) v1(69.367,94.818) 71.222,94.818 73.965,92.075 74.854,92.075 75.895,91.034 75.895,84.506 75.59,84.201 71.018,84.201 70.155,83.337 56.159,83.337 55.905,83.591 v1(55.296,83.591)
NetR4_1: R4.1 U1.92 U3.14 | length 69.5
  Top Layer w0.3: U3.14 46.609,93.929 46.33,94.209 45.11,94.209 44.704,93.802 44.704,91.451 44.584,91.331 44.584,90.29 45.441,89.433 46.812,89.433 47.244,89.002 47.244,83.947 R4.1 48.006,82.906 49.378,81.534 65.837,81.534 68.326,84.023 68.326,98.755 69.85,100.279 69.85,111.601 69.088,112.363 U1.92
NetR5_1: R5.1 U3.3 | length 37.7
  Top Layer w0.3: v1(45.631,85.357) 46.609,86.335 U3.3 ; v1(61.874,84.023) 64.872,87.02 66.457,87.02 67.691,88.254 67.691,95.972 66.381,97.282 R5.1
  Bottom Layer w0.3: v1(45.631,85.357) 46.768,84.22 61.678,84.22 v1(61.874,84.023)
RESET: P1.3 R1.1 SW1.1 SW1.2 U1.30 | length 32.8
  Top Layer w0.3: U1.30 51.55,114.363 50.902,115.011 50.902,118.377 52.921,120.396 SW1.2 SW1.1 62.636,121.956 63.505,122.825 R1.1 73.136,122.825 P1.3
RX: P2.1 S1.4 U1.46 | length 75.1
  Top Layer w0.3: v1(47.701,104.292) 49.772,106.363 U1.46
  Bottom Layer w0.3: v1(47.701,104.292) 40.742,104.292 32.893,96.444 32.893,89.078 34.9,87.071 37.16,87.071 S1.4 39.3,87.065 73.082,87.065 P2.1
SCK: P1.2 U1.20 | length 19.8
  Top Layer w0.3: U1.20 56.825,119.182 57.302,119.659 73.762,119.659 P1.2
TX: P2.2 S1.2 U1.45 | length 64.5
  Top Layer w0.3: v1(37.846,97.155) 37.846,97.074 38.227,96.693 S1.2 ; v1(50.089,107.112) 50.338,106.863 U1.45
  Bottom Layer w0.3: v1(37.846,97.155) 38.954,98.263 38.954,98.39 40.005,99.441 44.475,99.441 50.089,105.054 v1(50.089,107.112) ; S1.2 44.052,90.678 44.577,90.153 46.145,90.153 46.358,90.366 50.996,90.366 51.146,90.516 53.801,90.516 54.344,89.973 72.714,89.973 P2.2
pads on no net: P3. U1.1 U1.2 U1.3 U1.4 U1.5 U1.6 U1.7 U1.8 U1.9 U1.12 U1.13 U1.14 U1.15 U1.16 U1.17 U1.18 U1.19 U1.23 U1.24 U1.25 U1.26 U1.27 U1.28 U1.29 U1.35 U1.36 U1.37 U1.38 U1.39 U1.40 U1.41 U1.42 U1.43 U1.44 U1.47 U1.48 U1.49 U1.50 U1.51 U1.52 U1.53 U1.54 U1.55 U1.56 U1.57 U1.58 U1.59 U1.60 U1.63 U1.64 U1.65 U1.66 U1.67 U1.68 U1.69 U1.70 U1.71 U1.72 U1.73 U1.74 U1.76 U1.78 U1.79 U1.82 U1.83 U1.84 U1.85 U1.86 U1.87 U1.88 U1.89 U1.90 U1.91 U1.94 U1.95 U1.96 U1.97 U3.1 U3.2 U3.13

## Silkscreen, mask and mechanical layers (free items; w line width, h text height)
Mechanical 1:
  the board outline again, w0.254

## Text inside footprints (layer, text, board x,y; h text height)
P1: Top Overlay "6" at 72.771,123.19 h1.27 r90; Top Overlay "3" at 75.311,123.19 h1.27 r90; Top Overlay "1" at 75.311,114.046 h1.27 r90; Top Overlay "4" at 72.771,113.538 h1.27 r90
P7: Top Overlay "8" at 73.025,109.347 h1.27 r90; Top Overlay "7" at 75.565,109.347 h1.27 r90; Top Overlay "1" at 75.565,98.171 h1.27 r90; Top Overlay "2" at 73.025,97.663 h1.27 r90